# Altium PCB PCB_Board1_v2.PcbDoc
Units mm, origin at the board's own origin, x right, y up, seen from the top; angles counter-clockwise.
Board outline 47.01 x 59.17 mm, 2 copper layers (Top Layer, Bottom Layer); 10 components, 9 nets, 43 pads, 21 vias.
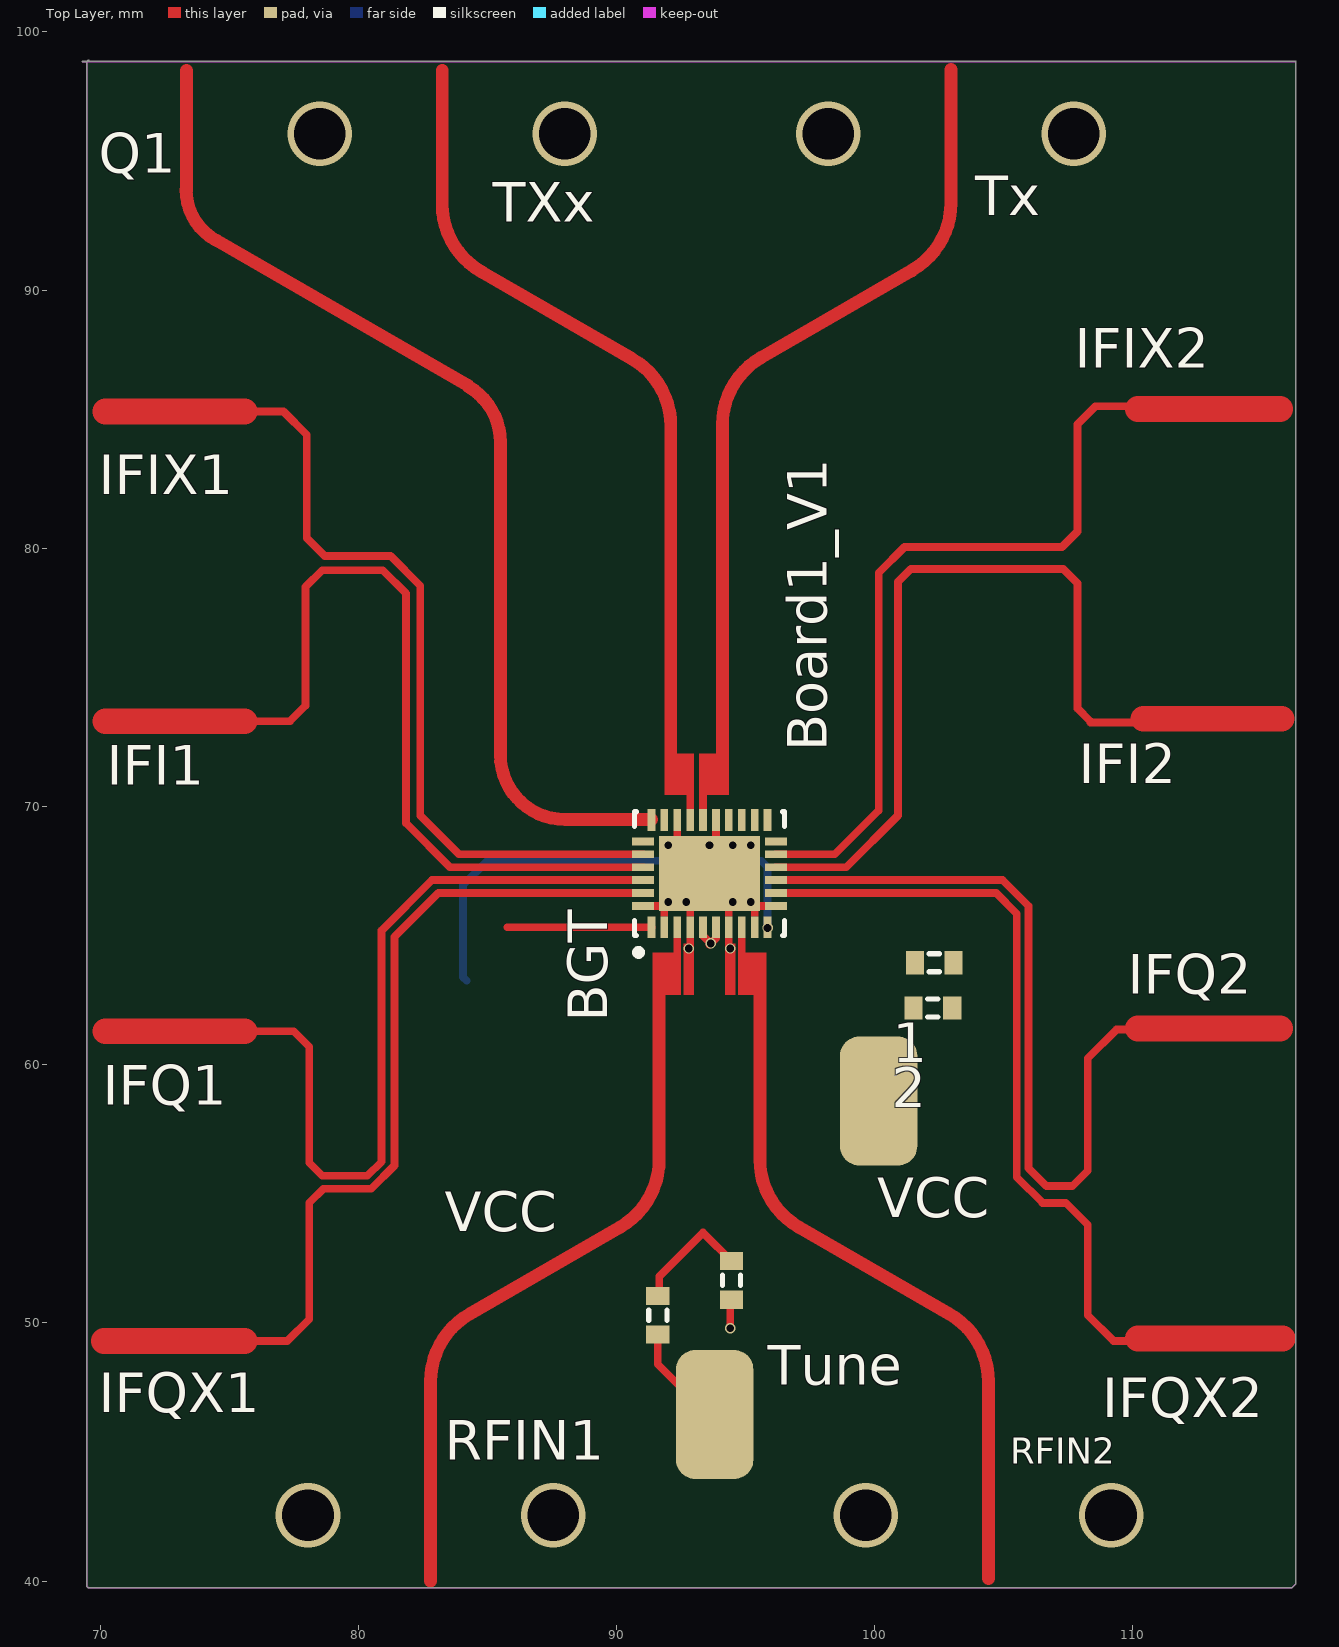
[diagram p0: Top Layer view]
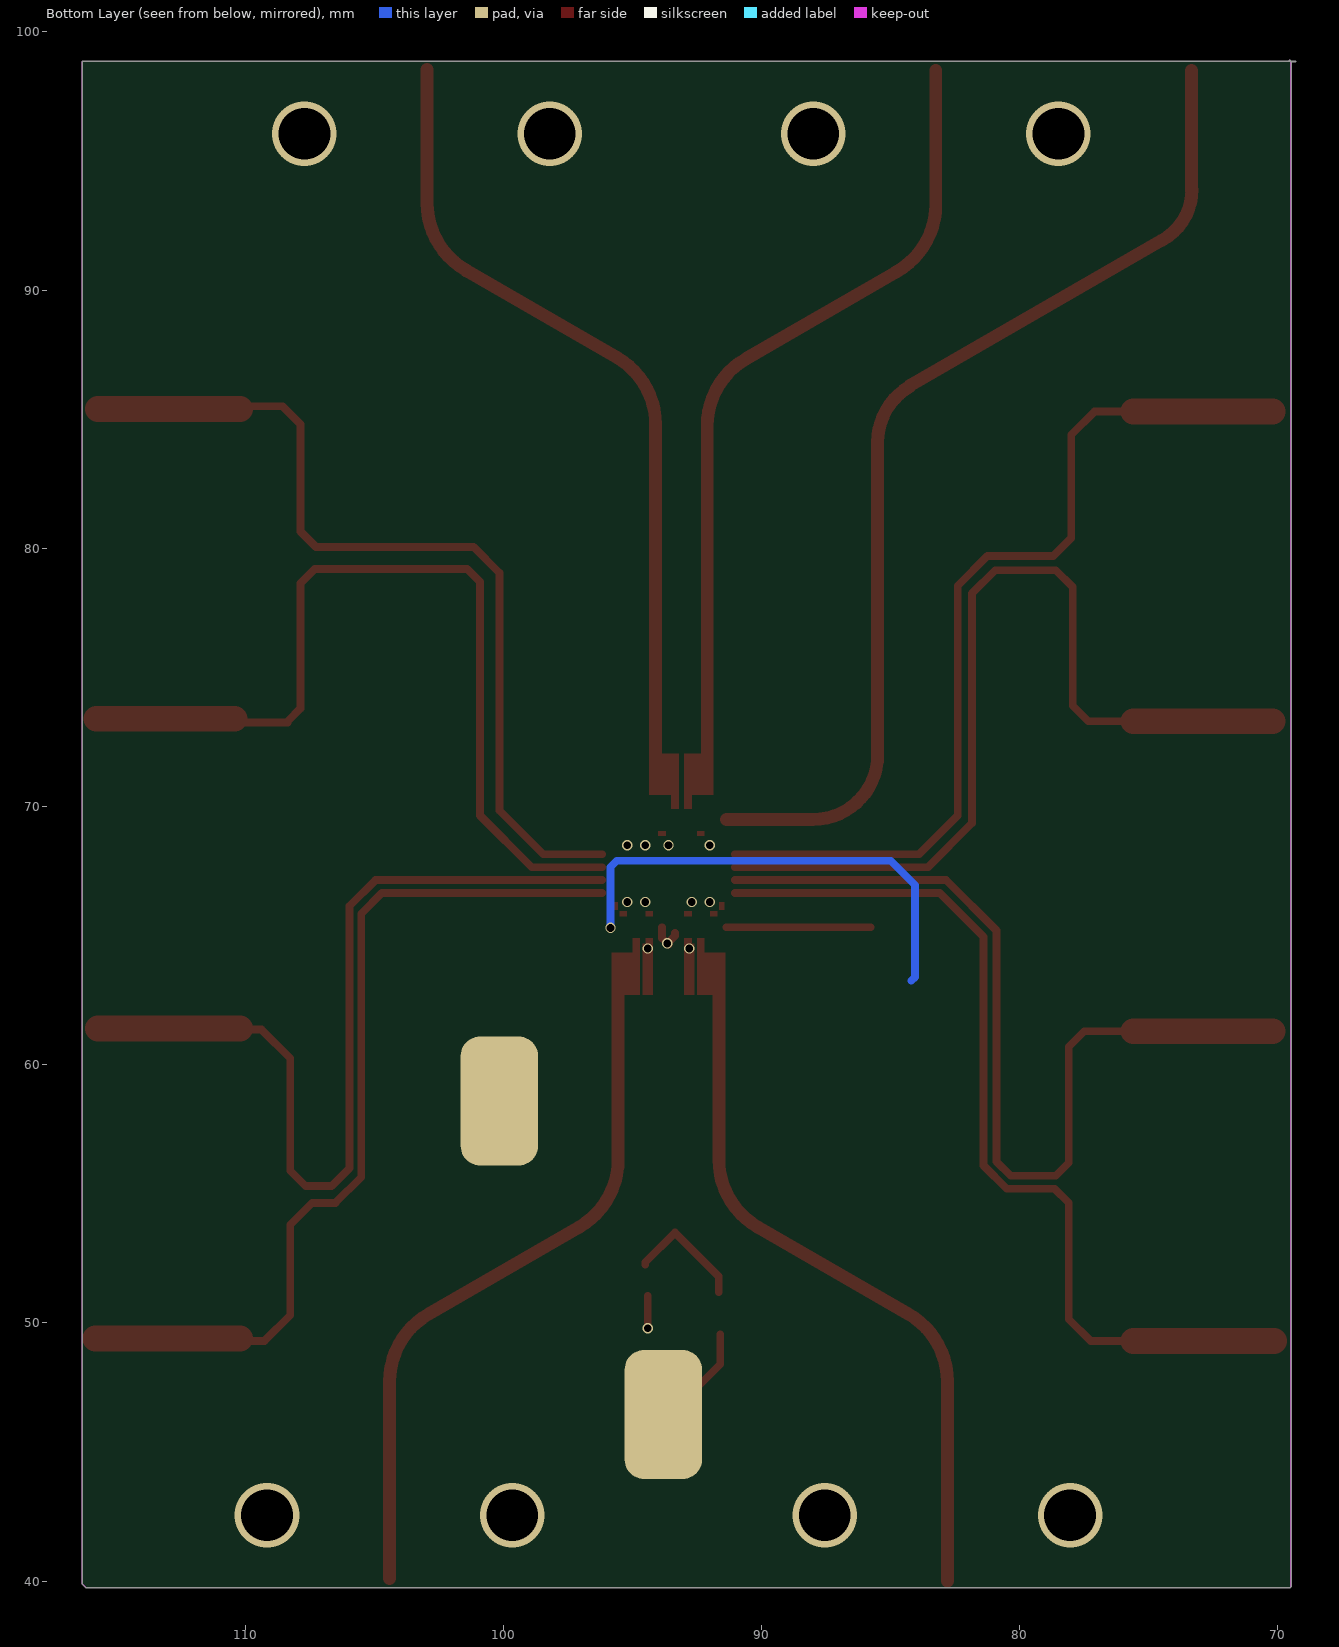
[diagram p1: Bottom Layer view, seen from below]

## Layer stack, top to bottom
Top Layer: signal copper 0.0356
Dielectric: dielectric 0.32, FR-4, Dk 4.8
Bottom Layer: signal copper 0.0356

## Board outline
69.3,98.837 69.487,98.837 69.487,39.8 69.491,39.791 69.541,39.741 69.55,39.737 116.15,39.737 116.159,39.741 116.309,39.891 116.313,39.9 116.313,98.85 116.3,98.863 69.531,98.863 69.559,98.891 69.563,98.9 69.541,98.909 69.495,98.863 69.3,98.863

## Design rules (kind name [scope] priority, off if disabled: settings)
AssemblyTestPointUsage [All] p1 off:
AssemblyTestpoint [All] p1 off: testpointundercomponent=TRUE minsize=1.016 maxsize=2.54 preferedsize=1.524 minholesize=0 maxholesize=1.016 preferedholesize=0.813 testpointgrid=0.025 usegrid=TRUE gridtolerance=0 allowsidetop=TRUE allowsidebottom=TRUE
Clearance [All] p1 off: gap=0.254
ComponentClearance [All] p1 off: gap=0.254 collisioncheckmode=3 verticalgap=0.254 showdistances=FALSE
DiffPairsRouting DiffPair_DiffPairsRouting [InDifferentialPair ('IF2')] p1: maxlimit=0.5 minlimit=0.5 mostfreqgap=0.5 maxuncoupledlength=12.7
DiffPairsRouting DiffPairsRouting_1 [InDifferentialPair ('IF2')] p2: maxlimit=0.254 minlimit=0.254 mostfreqgap=0.254 maxuncoupledlength=12.7
DiffPairsRouting DiffPair_DiffPairsRouting_1 [InDifferentialPair ('IF2')] p3: maxlimit=0.5 minlimit=0.5 mostfreqgap=0.5 maxuncoupledlength=12.7
DiffPairsRouting [All] p4 off: maxlimit=0.254 minlimit=0.254 mostfreqgap=0.254 maxuncoupledlength=12.7
FabricationTestPointUsage [All] p1 off: valid=0 allowmultiple=FALSE
FabricationTestpoint [All] p1 off: side=3 testpointundercomponent=TRUE minsize=1.016 maxsize=2.54 preferedsize=1.524 minholesize=0 maxholesize=1.016 preferedholesize=0.813 testpointgrid=0.025 allowsidetop=TRUE allowsidebottom=TRUE usegrid=TRUE gridtolerance=0
FanoutControl Fanout_BGA [IsBGA] p1 off: bgadir=Out bgaviamode=Centered fanoutstyle=Auto fanoutdirection=Alternating viagrid=0.025 // Fanout_BGA (Default Rule)
FanoutControl Fanout_LCC [IsLCC] p2 off: bgadir=Out bgaviamode=Centered fanoutstyle=Auto fanoutdirection=Alternating viagrid=0.025 // Fanout_LCC (Default Rule)
FanoutControl Fanout_SOIC [IsSOIC] p3 off: bgadir=Out bgaviamode=Centered fanoutstyle=Auto fanoutdirection=Alternating viagrid=0.025 // Fanout_SOIC (Default Rule)
FanoutControl Fanout_Small [(CompPinCount < 5)] p4 off: bgadir=Out bgaviamode=Centered fanoutstyle=Auto fanoutdirection=OutThenIn viagrid=0.025 // Fanout_Small (Default Rule)
FanoutControl Fanout_Default [All] p5 off: bgadir=Out bgaviamode=Centered fanoutstyle=Auto fanoutdirection=Alternating viagrid=0.025 // Fanout_Default (Default Rule)
Height [All] p1 off: minheight=0 maxheight=25.4 prefheight=12.7
HoleSize [All] p1 off: absolutevalues=TRUE maxlimit=2.54 minlimit=0.025 maxpercent=80.000 minpercent=20.000
HoleToHoleClearance [All] p1 off: gap=0.254 allowstackedmicrovias=TRUE
LayerPairs [All] p1 off: enforce=TRUE
MatchedLengths DiffPair_MatchedLengths [InDifferentialPair ('IF2')] p1: tolerance=25.4 checknetsindiffpair=TRUE checkdiffpairvsdiffpair=TRUE checkothers=TRUE
MatchedLengths [InDifferentialPair ('IF2')] p2: tolerance=25.4 checknetsindiffpair=TRUE checkdiffpairvsdiffpair=TRUE checkothers=TRUE
MatchedLengths DiffPair_MatchedLengths_1 [InDifferentialPair ('IF2')] p3: tolerance=25.4 checknetsindiffpair=TRUE checkdiffpairvsdiffpair=TRUE checkothers=TRUE
MinimumSolderMaskSliver [All] p1 off: minsoldermaskwidth=0.254
NetAntennae [All] p1 off: netantennaetolerance=0
PasteMaskExpansion [All] p1 off: expansion=0
PlaneClearance [All] p1 off: clearance=0.508
PlaneConnect [All] p1 off: planeconnectstyle=Relief reliefexpansion=0.508 reliefentries=4 reliefconductorwidth=0.254 reliefairgap=0.254
PolygonConnect [All] p1 off: connectstyle=Relief reliefconductorwidth=0.254 reliefentries=4 polygonreliefangle="90 Angle" airgapwidth=0.254
RoutingCorners [All] p1 off: cornerstyle=45-Degree minsetback=2.54 maxsetback=2.54
RoutingLayers [All] p1 off: top layer_v5=TRUE bottom layer_v5=TRUE
RoutingPriority [All] p1 off: routingpriority=0
RoutingTopology [All] p1 off: topology=Shortest
RoutingVias [All] p1 off: holewidth=0.711 width=1.27 viastyle="Through Hole" minholewidth=0.711 minwidth=1.27 maxholewidth=0.711 maxwidth=1.27
ShortCircuit [All] p1 off: allowed=FALSE
SilkToSilkClearance [All] p1 off: silktosilkclearance=0.254
SilkToSolderMaskClearance [IsPad] p1 off: minsilkscreentomaskgap=0.254 clearancetoexposedcopper=TRUE
SolderMaskExpansion [All] p1 off: expansion=0.102
UnRoutedNet [All] p1 off:
Width DiffPair_Width [InDifferentialPair('IF2')] p1: maxlimit=0.3 minlimit=0.3 preferedwidth=0.3
Width Width_1 [InDifferentialPair('IF2')] p2: maxlimit=0.254 minlimit=0.254 preferedwidth=0.254
Width DiffPair_Width_1 [InDifferentialPair('IF2')] p3: maxlimit=0.254 minlimit=0.254 preferedwidth=0.3
Width [All] p4 off: maxlimit=0.254 minlimit=0.254 preferedwidth=0.254

## Classes and differential pairs
differential pair IF1Q: +IFQ1 -IFQX1
differential pair IFI1: +IFI1 -IFIX1
differential pair IF2: +IFIX2 -IFI2
differential pair IF2Q: +IFIQ2 -IFQX2

## Components (designator, comment, footprint, x,y, rotation, side; value= is the part's Value field where it differs from the comment)
1 "Comment" J1-0603 102.3,63.95 r0 top
2 "Comment" J1-0603 102.25,62.2 r0 top
BGT "Comment" bgt24mtr12 93.6,67.4 r90 top
Designator1 "Comment" 45du_ads_tlines__MSABND_MDS__layout_Bend1_ 65.316,133.461 r90 top
Designator1 "Comment" 45du_ads_tlines__MSABND_MDS__layout_Bend1_ 65.316,133.461 r90 top
Designator1 "Comment" test_ads_tlines__MSABND_MDS__layout_Bend1_ 200.275,138.775 r90 top
Designator1 "Comment" test_ads_tlines__MSABND_MDS__layout_Bend1_ 6.275,3.775 r90 top
Designator1 "Comment" test_ads_tlines__MSABND_MDS__layout_Bend1_ 6.275,3.775 r90 top
? "Comment" J1-0603 94.45,51.65 r270 top
? "Comment" J1-0603 91.6,50.3 r90 top

## Footprints (in the part's own frame and the unit in brackets; to place one, negate y for a bottom-side part, rotate by r counter-clockwise, add the part's x,y. Pads: shape width x height; smd on the part's side, far side on the other; paste and mask are expansions set on the pad)
45du_ads_tlines__MSABND_MDS__layout_Bend1_ [mm]
bgt24mtr12 [mm] "QFN, 32-Leads, Body 5.40x4.40mm, Pitch 0.50mm, Thermal Pad 3.90x2.90mm, IPC Medium Density"
  rect 0.85x0.3 smd mask+0: 0(2.075,-0.75) 1(-2.075,2.25) 3(-2.075,1.25) 4(-2.075,0.75) 5(-2.075,0.25) 6(-2.075,-0.25) 7(-2.075,-0.75) 8(-2.075,-1.25) 9(-2.075,-1.75) 10(-2.075,-2.25) 17(2.075,-2.25) 18(2.075,-1.75) 19(2.075,-1.25) 21(2.075,-0.25) 22(2.075,0.25) 23(2.075,0.75) 24(2.075,1.25) 25(2.075,1.75) 26(2.075,2.25)
  rect 0.85x0.3 smd paste+0 mask+0: 2(-2.075,1.75)
  rect 0.3x0.85 smd mask+0: 11(-1.25,-2.575) 12(-0.75,-2.575) 13(-0.25,-2.575) 14(0.25,-2.575) 15(0.75,-2.575) 16(1.25,-2.575) 27(1.25,2.575) 28(0.75,2.575) 29(0.25,2.575) 30(-0.25,2.575) 31(-0.75,2.575) 32(-1.25,2.575)
  rect 2.9x3.9 smd mask+0: 33(0,0)
  Top Layer region: -6,-2.2 -4.7,-2.2 -4.7,-1.7 -6,-1.7
  Top Layer region: -6,1.7 -4.7,1.7 -4.7,2.2 -6,2.2
  Top Layer region: -4.7,-2.2 -3.05,-2.2 -3.05,-1.1 -4.7,-1.1
  Top Layer region: -3.05,-1.4 -2.5,-1.4 -2.5,-1.1 -3.05,-1.1
  Top Layer region: -4.7,1.1 -3.05,1.1 -3.05,2.2 -4.7,2.2
  Top Layer region: -3.05,1.1 -2.5,1.1 -2.5,1.4 -3.05,1.4
  Top Layer region: 4.65,-0.75 6.1,-0.75 6.1,-0.25 4.65,-0.25
  Top Layer region: 4.65,1.25 6.1,1.25 6.1,1.75 4.65,1.75
  Top Layer region: 3.05,0.6 4.65,0.6 4.65,1.75 3.05,1.75
  Top Layer region: 2.5,0.6 3.05,0.6 3.05,0.9 2.5,0.9
  Top Layer region: 3.05,-0.75 4.65,-0.75 4.65,0.4 3.05,0.4
  Top Layer region: 2.5,0.1 3.05,0.1 3.05,0.4 2.5,0.4
  Top Layer region: -1.4,1.95 -1.1,1.95 -1.1,2.175 -1.4,2.175
  Top Layer region: -1.4,-2.2 -1.1,-2.2 -1.1,-1.95 -1.4,-1.95
  silkscreen extent -3.17,-2.9 2.4,2.9
J1-0603 [mm] "Chip Resistor, Body 1.6x0.8mm, IPC High Density"
  rect 0.7x0.9 smd: 1(-0.75,0) 2(0.75,0)
  silkscreen extent -0.2,-0.35 0.2,0.35, body extent -0.85,-0.48 0.85,0.48, height 0.9
test_ads_tlines__MSABND_MDS__layout_Bend1_ [mm]

## Free pads (board coordinates)
  rrect50% 3x5 all layers, no hole: 2(93.8,46.45) 2(100.15,58.6)

## Via types
v1: diameter 0.4, hole 0.3, Top Layer to Bottom Layer, 13 vias
v2: diameter 2.5, hole 2, Top Layer to Bottom Layer, 8 vias

## Nets (pads, with @x,y where several pads share a name; then routed paths per layer and width w, separated by ;. In a path a pad name is that pad's centre, name@x,y a point inside that pad or via, vN(x,y) a via of type N, cw(c..) or ccw(c..) an arc to the next point about the centre after c; other vN are vias at no path point)
IFI1:  | length 35.9
  Top Layer w0.3: 75.6,73.3 77.35,73.3 77.95,73.9 77.95,78.5 78.6,79.15 80.95,79.15 81.85,78.25 81.85,69.35 83.55,67.65 91.025,67.65
  Top Layer w1: 70.2,73.3 75.6,73.3
IFI2:  | length 34.7
  Top Layer w0.3: 96.175,67.65 98.9,67.65 100.9,69.65 100.9,78.7 101.4,79.2 107.3,79.2 107.85,78.65 107.85,73.8 108.35,73.3 ; 108.35,73.25 110.1,73.25
  Top Layer w1: 110.4,73.4 115.76,73.4
IFIQ2:  | length 36.3
  Top Layer w0.3: 96.175,67.15 104.95,67.15 105.95,66.15 105.95,56 106.65,55.3 107.65,55.3 108.25,55.9 108.25,60.25 109.362,61.362 111.038,61.362
  Top Layer w1: 110.2,61.4 115.7,61.4
IFIX1:  | length 35.9
  Top Layer w0.3: 75.2,85.3 77.1,85.3 78,84.4 78,80.4 78.7,79.7 81.25,79.7 82.4,78.55 82.4,69.65 83.9,68.15 91.025,68.15
  Top Layer w1: 70.2,85.3 75.6,85.3
IFIX2:  | length 34.6
  Top Layer w0.3: 96.175,68.15 98.45,68.15 100.15,69.85 100.15,79.05 101.15,80.05 107.25,80.05 107.85,80.65 107.85,84.8 108.55,85.5 110.1,85.5 110.2,85.4
  Top Layer w1: 110.2,85.4 115.7,85.4
IFQ1:  | length 35.8
  Top Layer w0.3: 75.6,61.3 77.5,61.3 78.1,60.7 78.1,56.2 78.6,55.7 80.35,55.7 80.9,56.25 80.9,65.2 82.85,67.15 91.025,67.15
  Top Layer w1: 70.2,61.3 75.6,61.3
IFQX1:  | length 35.9
  Top Layer w0.3: 75.6,49.3 77.25,49.3 78.1,50.15 78.1,54.65 78.65,55.2 80.5,55.2 81.4,56.1 81.4,64.95 83.1,66.65 91.025,66.65
  Top Layer w1: 70.15,49.3 75.6,49.3
IFQX2:  | length 36.3
  Top Layer w0.3: 96.175,66.65 104.7,66.65 105.5,65.85 105.5,55.65 106.5,54.65 107.4,54.65 108.25,53.8 108.25,50.3 109.25,49.3 111.688,49.3
  Top Layer w1: 110.2,49.4 115.8,49.4
VCC: 1.1 2.1 BGT.1 BGT.10 pad.2 | length 24
  Top Layer w0.3: 85.775,65.325 BGT.1
  Bottom Layer w0.3: 84.2,63.25 84.05,63.4 84.05,66.95 85,67.9 95.6,67.9 95.85,67.65 v1(95.85,65.3)
  other v1: 92.8,64.5 94.4,64.5
pads on no net: 1.2 2.2 ?.1 ?.2 BGT.0 BGT.2 BGT.3 BGT.4 BGT.5 BGT.6 BGT.7 BGT.8 BGT.9 BGT.11 BGT.12 BGT.13 BGT.14 BGT.15 BGT.16 BGT.17 BGT.18 BGT.19 BGT.21 BGT.22 BGT.23 BGT.24 BGT.25 BGT.26 BGT.27 BGT.28 BGT.29 BGT.30 BGT.31 BGT.32 BGT.33
copper on no net: | length 162.2
  Top Layer w0.3: 91.6,49.55 91.6,48.4 93.65,46.35 ; 91.65,51.2 91.65,51.8 93.35,53.5 94.5,52.35 94.5,52.25 ; 93.35,65.1 93.35,65 93.6,64.75 93.6,64.65 93.85,64.9 93.85,65.325 ; v1(94.4,49.8) 94.4,51.05
  Top Layer w0.5: 73.328,93.893 ccw(c75.572,93.893) 74.45,91.95 ; 73.35,93.85 73.35,98.5 ; 74.515,91.92 84.25,86.3 ; 82.8,40 82.8,47.65 ; 82.8,47.74 cw(c85.8,47.74) 84.3,50.338 ; 83.25,98.5 83.25,93.322 ccw(c86.25,93.322) 84.75,90.724 ; 84.256,86.267 cw(c83.013,84.113) 85.5,84.113 85.5,71.941 ; 84.299,50.338 90.117,53.697 ; 84.783,90.697 90.601,87.338 cw(c89.1,84.74) 92.1,84.74 ; 85.5,72 ccw(c88,72) 88,69.5 91.35,69.5 ; 90.15,53.724 ccw(c88.65,56.322) 91.65,56.322 91.65,61.5 ; 92.1,73.35 92.1,84.65 ; 94.1,73.4 94.1,84.7 ; 94.1,84.79 cw(c97.1,84.79) 95.6,87.388 ; 95.55,61.5 95.55,56.322 ccw(c98.55,56.322) 97.05,53.724 ; 95.599,87.388 101.417,90.747 ; 97.083,53.697 102.901,50.338 cw(c101.4,47.74) 104.4,47.74 ; 101.45,90.774 ccw(c99.95,93.372) 102.95,93.372 102.95,98.55 ; 104.4,40.1 104.4,47.65
  other v1: 93.65,64.7 92,66.3 92.7,66.3 94.5,66.3 95.2,66.3 92,68.5 93.6,68.5 94.5,68.5 95.2,68.5
  other v2: 78.05,42.55 87.55,42.55 99.65,42.55 109.15,42.55 78.5,96.05 88,96.05 98.2,96.05 107.7,96.05

## Keep-outs
Keep-Out Layer:
  lines w0.025: 69.3,98.85 116.3,98.85 116.3,98.55 116.3,39.9 116.15,39.75 69.55,39.75 69.5,39.8 69.5,98.85 69.55,98.9

## Other copper
Top Layer:
  rectangle: 95.2,65.75 95.5,65.95
  rectangle: 94.2,65.75 94.5,65.95
  rectangle: 92.7,65.75 93,65.95
  rectangle: 91.7,65.75 92,65.95
  rectangle: 93.7,68.85 94,69.05
  rectangle: 92.2,68.85 92.5,69.05
  rectangle net VCC: 92.6,62.7 93,64.7
  rectangle net VCC: 94.2,62.7 94.6,64.7
  rectangle net VCC: 92.7,64.7 93,64.9
  rectangle net VCC: 94.2,64.7 94.5,64.9
  region: 6.879,4.629 6.525,4.275 6.525,3.775 6.025,3.775 6.525,4.982

## Silkscreen, mask and mechanical layers (free items; w line width, h text height)
Top Overlay:
  text "Q1" at 69.95,94.55 h1.52
  text "Tx" at 103.9,92.9 h1.52
  text "TXx" at 85.2,92.65 h1.52
  text "IFIX2" at 107.75,87 h1.52
  text "IFIX1" at 69.95,82.1 h1.52
  text "Board1_V1" at 98.15,72.15 h1.52 r90
  text "IFI2" at 107.9,70.9 h1.52
  text "IFI1" at 70.25,70.85 h1.52
  text "IFQ2" at 109.8,62.75 h1.52
  text "IFQ1" at 70.1,58.45 h1.52
  text "VCC" at 100.1,54.1 h1.52
  text "VCC" at 83.35,53.55 h1.52
  text "Tune" at 95.85,47.6 h1.52
  text "IFQX1" at 69.95,46.55 h1.52
  text "IFQX2" at 108.8,46.35 h1.52
  text "RFIN1" at 83.35,44.7 h1.52
  text "RFIN2" at 105.25,44.55 h1